# EAGLE board BusPirate-Shield-v1.0 (EAGLE 5.07)
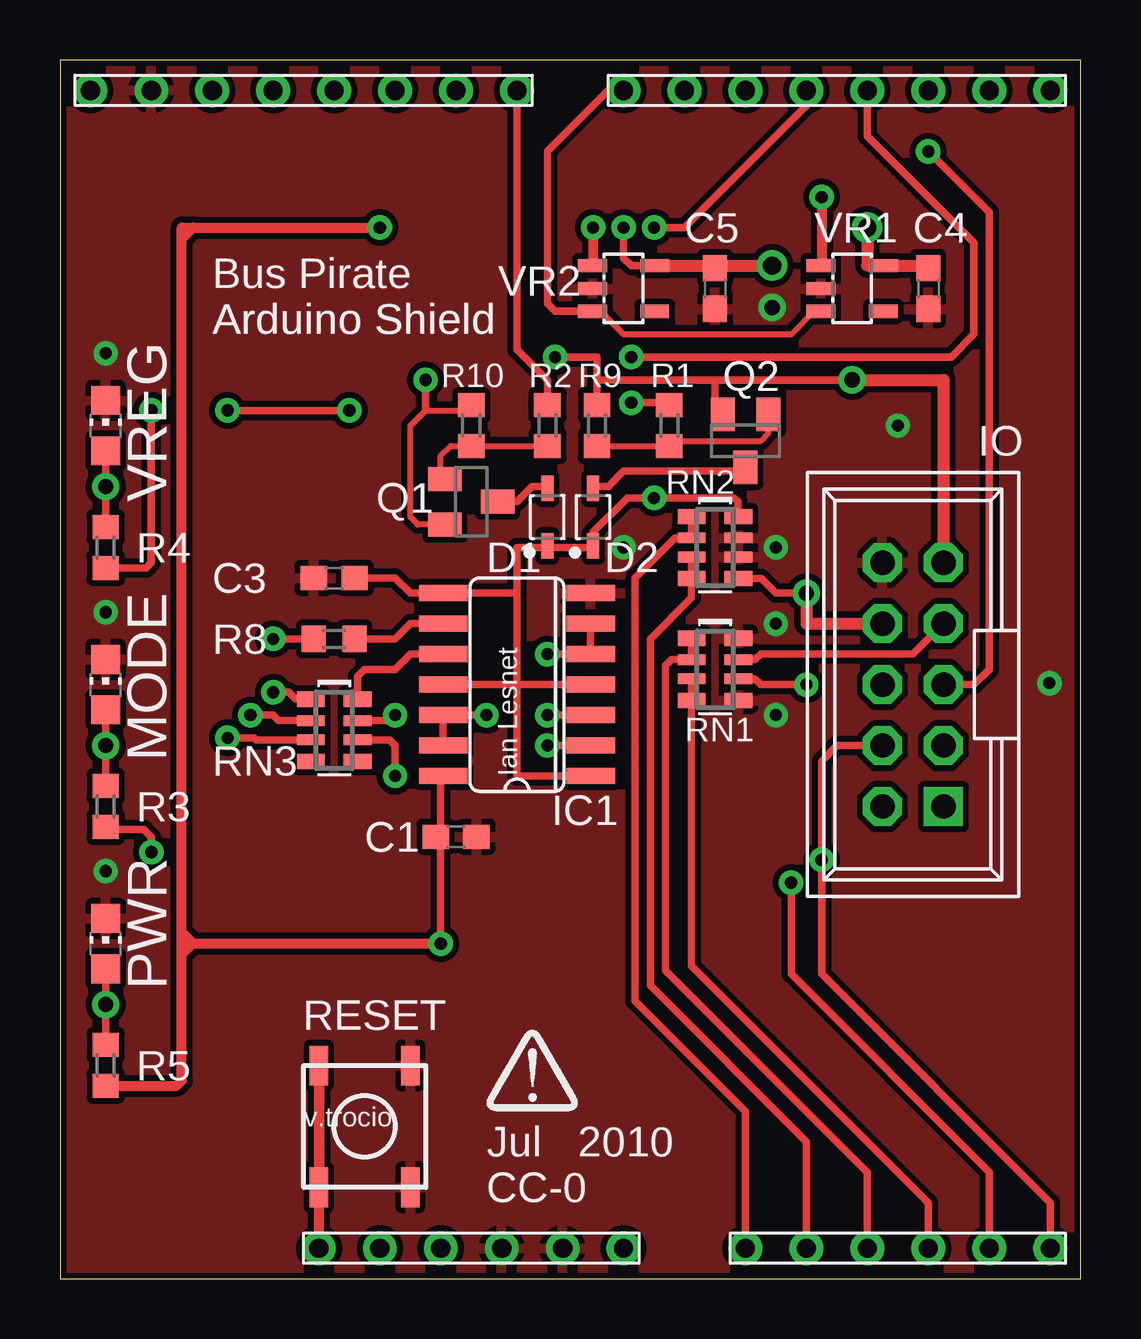
[diagram p0: board, top side]
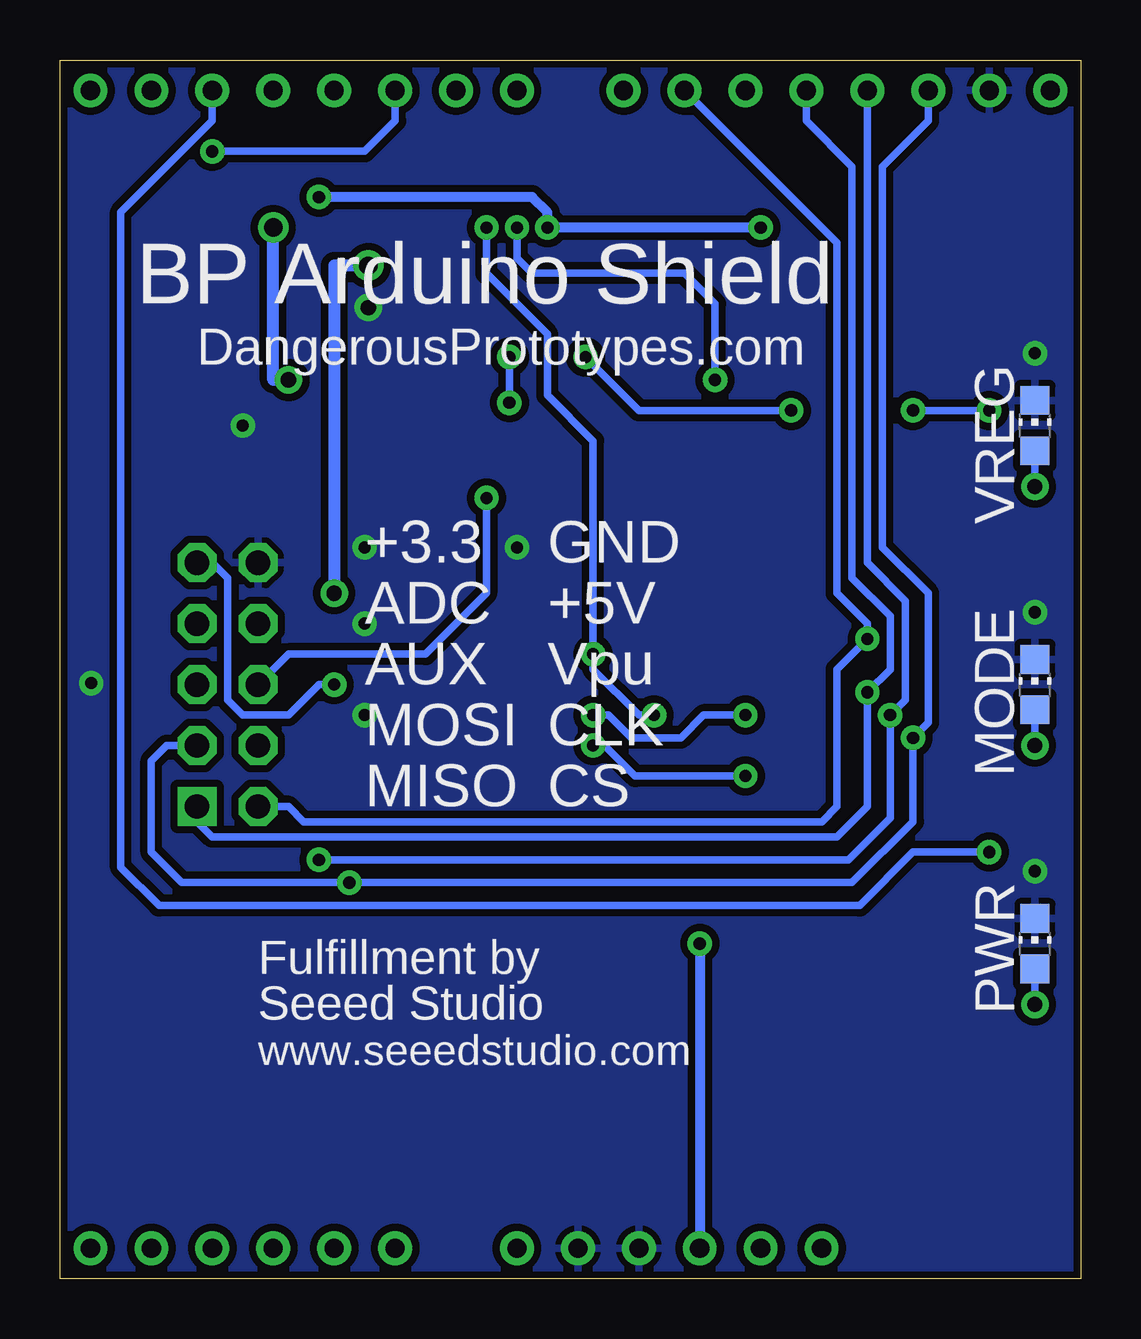
[diagram p1: board, bottom side, seen from below]

Size 42.55 x 50.8 mm. Coordinates in mm from the lower left corner, seen from the top.
Outline: 0,50.8 0,0 42.55,0 42.55,50.8 0,50.8
Copper layers (1*16): Top 0.035mm / dielectric 1.5mm / Bottom 0.035mm
Design rules "SparkFun": minimum track width 8mil, minimum drill 20mil, track to track 8mil, track to pad 8mil, pad to pad 8mil, via to via 8mil, smd to smd 8mil, copper to edge 10mil, drill to drill 8mil, minimum pad ring 12mil, minimum via ring 10mil, stop-mask expansion 4mil, vias tented up to drill 25mil, thermal gap 10mil

## Footprints (pad centres in the part's own frame; a part is rotated, then mirrored left to right if it is on the bottom)
ARDUINO = drill 0.8 round: 3V3 25.4,-12.7; 5V 25.4,-10.16; A_0 25.4,2.54; A_1 25.4,5.08; A_2 25.4,7.62; A_3 25.4,10.16; A_4 25.4,12.7; A_5 25.4,15.24; AREF -22.86,-24.765; D_0 -22.86,15.24; D_1 -22.86,12.7; D_2 -22.86,10.16; D_3 -22.86,7.62; D_4 -22.86,5.08; D_5 -22.86,2.54; D_6 -22.86,0; D_7 -22.86,-2.54; D_8 -22.86,-6.985; D_9 -22.86,-9.525; D_10 -22.86,-12.065; D_11 -22.86,-14.605; D_12 -22.86,-17.145; D_13 -22.86,-19.685; GND0 -22.86,-22.225; GND1 25.4,-7.62; GND2 25.4,-5.08; RESET 25.4,-15.24; VIN 25.4,-2.54
C0603 = smd 1.1 x 1: 1 -0.85,0; 2 0.85,0
SOD2514X100N = smd 1.05 x 0.5: A 1.2,0; K -1.2,0
SO14 = smd 0.66 x 2.032: 1 -3.81,-3.073; 2 -2.54,-3.073; 3 -1.27,-3.073; 4 0,-3.073; 5 1.27,-3.073; 6 2.54,-3.073; 7 3.81,-3.073; 8 3.81,3.073; 9 2.54,3.073; 10 1.27,3.073; 11 0,3.073; 12 -1.27,3.073; 13 -2.54,3.073; 14 -3.81,3.073
PINSHRD_PTH_2X05 = drill 1.016 square: 1 -5.08,-1.27 | drill 1.016 octagon: 2 -5.08,1.27; 3 -2.54,-1.27; 4 -2.54,1.27; 5 0,-1.27; 6 0,1.27; 7 2.54,-1.27; 8 2.54,1.27; 9 5.08,-1.27; 10 5.08,1.27
CHIP-LED0805 = smd 1.2 x 1.2: A 0,-1.05; C 0,1.05
SOT23 = smd 1 x 1.4: 1 -0.95,-1.1; 2 0.95,-1.1; 3 0,1.1
R0603 = smd 1 x 1.1: 1 -0.85,0; 2 0.85,0
TACT_SWITCH_SMALL = smd 1.651 x 0.762: 1 -2.54,1.905; 2 2.54,1.905; 3 -2.54,-1.905; 4 2.54,-1.905
RN8P-4R-CRA06S = smd 0.63 x 1.15: 1 -1.295,-0.975; 4 1.295,-0.975; 5 1.295,0.975; 8 -1.295,0.975 | smd 0.44 x 1.15: 2 -0.4,-0.975; 3 0.4,-0.975; 6 0.4,0.975; 7 -0.4,0.975
SOT-23-5 = smd 0.55 x 1.2: 1 -0.95,-1.3; 2 0,-1.3; 3 0.95,-1.3; 4 0.95,1.3; 5 -0.95,1.3

## Placement (x,y rotation side)
ARDUINO1  ARDUINO  [ARDUINO]  26.04,26.67 270 top
C1  0.1uF  [C0603]  16.51,18.41 0 top
C3  0.1uF  [C0603]  11.43,29.21 180 top
C4  1uF  [C0603]  36.19,41.27 270 top
C5  1uF  [C0603]  27.3,41.27 270 top
D1  [SOD2514X100N]  20.32,31.75 90 top
D2  [SOD2514X100N]  22.22,31.75 90 top
IC1  4066D  [SO14]  19.05,24.77 90 top
IO  PINSHRD-PTH-2X05  [PINSHRD_PTH_2X05]  35.56,24.77 90 top
LED1  [CHIP-LED0805]  1.9,13.97 0 top
LED1A  [CHIP-LED0805]  1.9,13.97 0 bottom
LED2  [CHIP-LED0805]  1.9,24.77 0 top
LED2A  [CHIP-LED0805]  1.9,24.77 0 bottom
LED3  [CHIP-LED0805]  1.9,35.56 0 top
LED3A  [CHIP-LED0805]  1.9,35.56 0 bottom
Q1  [SOT23]  17.14,32.39 270 top
Q2  [SOT23]  28.58,34.92 180 top
R1  1K  [R0603]  25.4,35.56 90 top
R2  1K  [R0603]  20.32,35.56 90 top
R3  1K1  [R0603]  1.9,19.68 270 top
R4  1K1  [R0603]  1.9,30.48 270 top
R5  1K1  [R0603]  1.9,8.89 270 top
R8  2K  [R0603]  11.43,26.67 0 top
R9  10K  [R0603]  22.38,35.56 90 top
R10  10K  [R0603]  17.14,35.56 90 top
RESET  SMD_TACT_SMALL  [TACT_SWITCH_SMALL]  12.7,6.35 90 top
RN1  10K  [RN8P-4R-CRA06S]  27.3,25.4 270 top
RN2  10K  [RN8P-4R-CRA06S]  27.3,30.48 270 top
RN3  10K  [RN8P-4R-CRA06S]  11.43,22.86 270 top
U$1  [DP-LOGO]  17.78,6.99 0 top
VR1  MIC5205-3.3BM5  [SOT-23-5]  33.02,41.27 270 top
VR2  MIC5205-5.0BM5  [SOT-23-5]  23.5,41.27 270 top

## Library data of the parts
ARDUINO1 IO RESET RN1-RN3 VR1 VR2 = dp_devices
C1 C3-C5 R1-R5 R8-R10 = rcl
D1 D2 = ipc-7351-diode
IC1 = 40xx
LED1 LED1A LED2 LED2A LED3 LED3A = led
Q1 Q2 = transistor-pnp
U$1 = DP-logo

## Nets
5V: ARDUINO1.5V C1.1 IC1.14 R5.2 VR1.1 VR2.1
ADC: IO.7 RN1.7
ADC1: ARDUINO1.A_2 RN1.1 RN1.2
ADC2: ARDUINO1.A_0 RN2.1 RN2.2
ADC3: ARDUINO1.A_3 RN1.3 RN1.4
ADC4: ARDUINO1.A_1 RN2.3 RN2.4
AUX: ARDUINO1.D_5 IO.5
CLOCK: ARDUINO1.A_5 ARDUINO1.D_12 IO.4 RN3.2
CS: ARDUINO1.D_9 IO.2 R8.1
GND: ARDUINO1.GND0 ARDUINO1.GND1 ARDUINO1.GND2 C1.2 C3.2 C4.2 C5.2 IC1.7 IO.10 LED1.C LED1A.C LED2.C LED2A.C LED3.C LED3A.C RESET.3 RESET.4 RN1.5 RN1.8 RN2.6 RN2.7 VR1.2 VR2.2
LD1: ARDUINO1.D_2 R3.2
MCLR: ARDUINO1.RESET RESET.1 RESET.2
MISO: ARDUINO1.D_11 IO.1 RN3.1
MOSI: ARDUINO1.A_4 ARDUINO1.D_13 IO.3 RN3.3
N$1: IC1.9 R8.2
N$2: IC1.10 RN3.8
N$3: ARDUINO1.D_10
N$4: IC1.2 RN3.6
N$5: IC1.3 RN3.7
N$6: LED2.A LED2A.A R3.1
N$7: LED1.A LED1A.A R5.1
N$9: D1.A Q1.3
N$10: Q1.1 R2.1 R10.1
N$12: D2.A Q2.3
N$13: Q2.1 R1.1 R9.1
N$18: LED3.A LED3A.A R4.1
PULLUPEN: ARDUINO1.D_4 IC1.5 IC1.6 IC1.12 IC1.13
PUVSEL33: ARDUINO1.D_3 R1.2
PUVSEL50: ARDUINO1.D_8 R2.2
SWV33: C4.1 IO.9 Q2.2 R4.2 R9.2 RN1.6 VR1.5
SWV50: C5.1 IO.8 Q1.2 R10.2 RN2.5 VR2.5
VEXTERN: C3.1 D1.K D2.K IC1.1 IC1.4 IC1.8 IC1.11 IO.6 RN2.8
VIN: ARDUINO1.VIN
VREGEN: ARDUINO1.D_7 VR1.3 VR2.3

## Tracks (layer width: path | path; a pad name or v marks a point on that pad's centre or on a via)
5V  (via drill 0.51)
  Top 0.305: 15.87,18.41 C1.1 | 15.87,18.41 15.87,20.95 | 15.87,20.95 15.87,20.99 | v15.87,13.97 15.87,18.41 | 15.87,20.95 IC1.14
  Top 0.406: 5.56,13.97 5.08,13.97 | 5.56,13.97 v15.87,13.97 | 5.56,43.81 5.08,43.81 5.08,43.34 | 5.56,43.81 v13.33,43.81 | v31.75,45.09 31.75,42.26 VR1.1 | VR2.1 22.22,42.23 v22.22,43.81 | R5.2 4.86,8.04 5.08,8.26 5.08,13.49 | 5.08,13.49 5.08,14.45 | 5.08,14.45 5.08,43.34 | 5.08,14.45 5.56,13.97 | 5.56,13.97 | 5.08,13.49 5.56,13.97 | 5.08,43.34 | 5.08,43.34 5.56,43.81
  Bottom 0.406: v15.87,13.97 ARDUINO1.5V | v13.33,43.81 v22.22,43.81 22.22,44.45 22.86,45.09 v31.75,45.09
ADC
  Top 0.305: RN1.7 28.97,25.8 29.21,26.04 35.56,26.04 IO.7
ADC1
  Top 0.305: RN1.1 RN1.2 25.48,25.8 25.24,25.56 25.24,12.86 33.66,4.45 ARDUINO1.A_2
ADC2
  Top 0.305: RN2.1 RN2.2 25.64,30.88 23.97,29.21 23.97,11.59 28.57,6.99 ARDUINO1.A_0
ADC3
  Top 0.305: RN1.3 RN1.4 26.33,13.04 36.19,3.17 ARDUINO1.A_3
ADC4
  Top 0.305: RN2.3 RN2.4 26.33,28.39 24.61,26.67 24.61,12.22 31.11,5.71 ARDUINO1.A_1
AUX  (via drill 0.51)
  Top 0.305: IO.5 38.1,24.77 38.73,25.4 38.73,44.45 v36.19,46.99
  Bottom 0.305: v36.19,46.99 29.85,46.99 28.57,48.26 ARDUINO1.D_5
CLOCK  (via drill 0.51)
  Top 0.305: RN3.2 9.12,23.26 8.89,23.5 v7.94,23.5 | IO.4 32.39,22.23 31.75,21.59 v31.75,17.46 31.75,12.7 41.27,3.17 ARDUINO1.A_5
  Bottom 0.305: ARDUINO1.D_12 8.89,29.84 7.3,28.26 7.3,24.13 v7.94,23.5 7.94,19.21 9.68,17.46 v31.75,17.46
CS  (via drill 0.51)
  Top 0.305: v8.89,26.67 R8.1
  Bottom 0.305: ARDUINO1.D_9 10.16,43.18 10.16,28.57 8.89,27.3 v8.89,26.67 10.16,25.4 10.16,19.68 10.79,19.05 32.39,19.05 33.02,19.68 IO.2
GND  (via drill 0.51, 0.64)
  other vias: 1.9,38.58 1.9,27.78 1.9,16.99 29.69,40.48 41.24,24.83 29.85,23.5 23.5,30.48 34.92,35.56 29.85,27.3 29.85,30.48
  pour Top (isolate 0.254, rank 2): 0,50.8 42.55,50.8 42.55,0 0,0
  pour Bottom (isolate 0.305, rank 2): 0,50.8 42.55,50.8 arc-3 42.55,0 0,0
LD1  (via drill 0.51)
  Top 0.305: R3.2 1.9,18.73 3.49,18.73 3.81,18.41 v3.81,17.78
  Bottom 0.305: v3.81,17.78 6.98,17.78 9.21,15.56 38.42,15.56 40,17.14 40,44.45 36.19,48.26 ARDUINO1.D_2
MCLR
  Top 0.406: ARDUINO1.RESET RESET.2 RESET.1
MISO  (via drill 0.51)
  Top 0.305: RN3.1 9.82,24.16 9.53,24.45 v8.89,24.45
  Bottom 0.305: ARDUINO1.D_11 11.43,48.26 9.53,46.35 9.53,29.21 7.94,27.62 7.94,25.4 v8.89,24.45 8.89,19.68 10.16,18.41 36.19,18.41 36.83,19.05 IO.1
MOSI  (via drill 0.51)
  Top 0.305: RN3.3 8.18,22.46 8.1,22.54 v6.98,22.54 | v30.48,16.51 30.48,12.7 38.73,4.45 ARDUINO1.A_4
  Bottom 0.305: ARDUINO1.D_13 6.35,48.26 8.25,46.35 8.25,30.48 6.35,28.57 6.35,23.18 v6.98,22.54 6.98,19.05 9.53,16.51 v30.48,16.51 37.47,16.51 38.73,17.78 38.73,21.59 38.1,22.23 IO.3
N$1
  Top 0.305: IC1.9 14.61,27.3 13.97,26.67 R8.2
N$2
  Top 0.305: IC1.10 14.61,26.04 13.97,25.4 12.7,25.4 12.4,25.11 RN3.8
N$4  (via drill 0.51)
  Top 0.305: v20.32,22.23 IC1.2 | RN3.6 13.73,22.46 13.97,22.23 v13.97,20.95
  Bottom 0.305: v20.32,22.23 19.84,22.23 18.57,20.95 v13.97,20.95
N$5  (via drill 0.51)
  Top 0.254: IC1.3 21.74,23.62
  Top 0.305: v20.32,23.5 IC1.3 | RN3.7 13.73,23.26 v13.97,23.5
  Bottom 0.305: v13.97,23.5 15.72,23.5 16.67,22.54 18.73,22.54 19.68,23.5 v20.32,23.5
N$6  (via drill 0.64)
  Top 0.305: v1.9,22.23 LED2A.A R3.1
  Top 0.406: R3.1 1.93,20.67
  Bottom 0.305: v1.9,22.23 LED2A.A
N$7  (via drill 0.64)
  Top 0.305: R5.1 v1.9,11.43 LED1.A
  Bottom 0.305: v1.9,11.43 LED1.A
N$9
  Top 0.305: Q1.3 19.05,32.38 19.68,33.02 | 19.68,33.02 | 19.68,33.02 20.25,33.02 D1.A | 19.68,33.02
N$10
  Top 0.254: R2.1 R10.1 16.29,34.71 15.87,34.29 15.87,33.51 Q1.1
N$12
  Top 0.305: 28.57,33.66 Q2.3 | 28.57,33.66 | 28.57,33.66 23.5,33.66 22.86,33.02 22.22,33.02 D2.A
N$13
  Top 0.254: R9.1 R1.1 25.61,34.92 29.21,34.92 29.53,35.24 Q2.1
N$18  (via drill 0.64)
  Top 0.305: LED3A.A v1.9,33.02 R4.1
  Top 0.406: LED3A.A 1.88,34.61
  Bottom 0.305: v1.9,33.02 LED3A.A
PULLUPEN  (via drill 0.51)
  Top 0.305: IC1.13 IC1.12 v17.78,23.5 | v24.76,43.81 26.04,43.81 31.11,48.9 ARDUINO1.D_4 | IC1.5 IC1.6 22.12,26.14 22.22,26.04 v20.32,26.04 IC1.5
  Bottom 0.305: v17.78,23.5 18.41,23.5 20.32,25.4 v20.32,26.04 20.32,34.92 22.22,36.83 22.22,39.37 24.76,41.91 v24.76,43.81
PUVSEL33  (via drill 0.51)
  Top 0.305: ARDUINO1.D_3 33.66,47.62 38.1,43.18 38.1,39.37 37.15,38.42 v23.81,38.42 | v23.81,36.51 25.3,36.51 R1.2
  Bottom 0.305: v23.81,36.51 v23.81,38.42
PUVSEL50
  Top 0.305: ARDUINO1.D_8 19.05,38.73 20.32,37.47 R2.2
SWV33  (via drill 0.51, 0.64, 0.76)
  Top 0.305: 2.01,29.53 R4.2 3.59,29.63 3.81,29.84 v3.81,36.2 | VR1.5 34.29,42.26 | v6.98,36.2 v12.07,36.2 | 22.38,37.47 27.3,37.47 | 27.3,37.47 v33.02,37.47 | 22.38,37.47 22.38,37.05 R9.2 | v20.64,38.42 22.38,38.42 22.38,37.47 | v31.11,24.77 29.21,24.77 28.97,25 RN1.6 | Q2.2 27.47,36.02 27.3,36.2 27.3,37.47
  Top 0.406: R4.2 1.9,29.53
  Top 0.508: v33.02,37.47 36.83,37.47 IO.9 | VR1.5 33.66,42.23 v33.66,43.81 | VR1.5 | VR1.5 36.19,42.23 C4.1
  Bottom 0.305: v12.07,36.2 18.41,36.2 v20.64,38.42 | v3.81,36.2 v6.98,36.2 | IO.9 36.19,29.84 35.56,29.21 35.56,24.13 34.92,23.5 33.02,23.5 31.75,24.77 v31.11,24.77
  Bottom 0.508: v33.02,37.47 33.66,37.47 v33.66,43.81
SWV50  (via drill 0.51, 0.64, 0.76)
  Top 0.254: Q1.2 14.92,31.43 14.61,31.75 14.61,35.56 15.24,36.2 17.14,36.2 R10.2
  Top 0.305: VR2.5 23.82,42.23 23.5,42.55 v23.5,43.81 | 15.24,36.2 v15.24,37.47 | RN2.5 29.23,29.18 29.85,28.57 v31.11,28.57
  Top 0.508: VR2.5 27.21,42.23 C5.1 27.41,42.23 v29.69,42.23 | IO.8 31.11,27.3 v31.11,28.57
  Bottom 0.305: v23.5,43.81 23.5,42.55 22.86,41.91 16.51,41.91 15.24,40.64 v15.24,37.47
  Bottom 0.508: v29.69,42.23 | v31.11,28.57 31.11,42.23 v29.69,42.23
VEXTERN  (via drill 0.51)
  Top 0.305: IC1.1 19.05,20.95 19.05,24.77 | 19.05,24.77 IC1.4 | 19.05,24.77 19.05,28.57 | 19.05,28.57 IC1.8 14.61,28.57 13.97,29.21 C3.1 | IC1.11 19.05,24.77 | 20.32,30.48 D1.K | 20.32,30.48 22.22,30.48 D2.K 22.22,31.11 23.65,32.54 v24.76,32.54 28.1,32.54 28.26,32.38 28.26,31.8 RN2.8 28.55,31.77 28.57,31.75 | 20.32,30.48 19.05,30.48 19.05,28.57
  Bottom 0.305: IO.6 33.02,26.04 27.3,26.04 24.76,28.57 v24.76,32.54
VREGEN
  Top 0.254: VR1.3 31.43,40.32 30.48,39.37 23.5,39.37 22.54,40.33
  Top 0.305: 22.54,40.33 VR2.3 20.64,40.33 20.32,40.64 20.32,46.99 22.86,49.53 ARDUINO1.D_7

## Text on the board
tPlace: Ian Lesnet | v.trocio | Jul | 2010 | CC-0
tNames: Bus Pirate | Arduino Shield | Arduino Shield | VREG | MODE | PWR
bNames: BP Arduino Shield | VREG | DangerousPrototypes.com | GND | +3.3 | MODE | +5V | ADC | Vpu | AUX | CLK | MOSI | CS | MISO | PWR | Fulfillment by | Seeed Studio | www.seeedstudio.com
tValues: vimark
Reference: I/O header | GND | +3.3V | +5V | ADC | Vpu | AUX | CLK | MOSI | CS | MISO | BUS PIRATE ARDUINO SHIELD | CC-0 | Ian Lesnet 2010 | http://dangerousprototypes.com